# EAGLE board 25mm_battery_board (EAGLE 6.2)
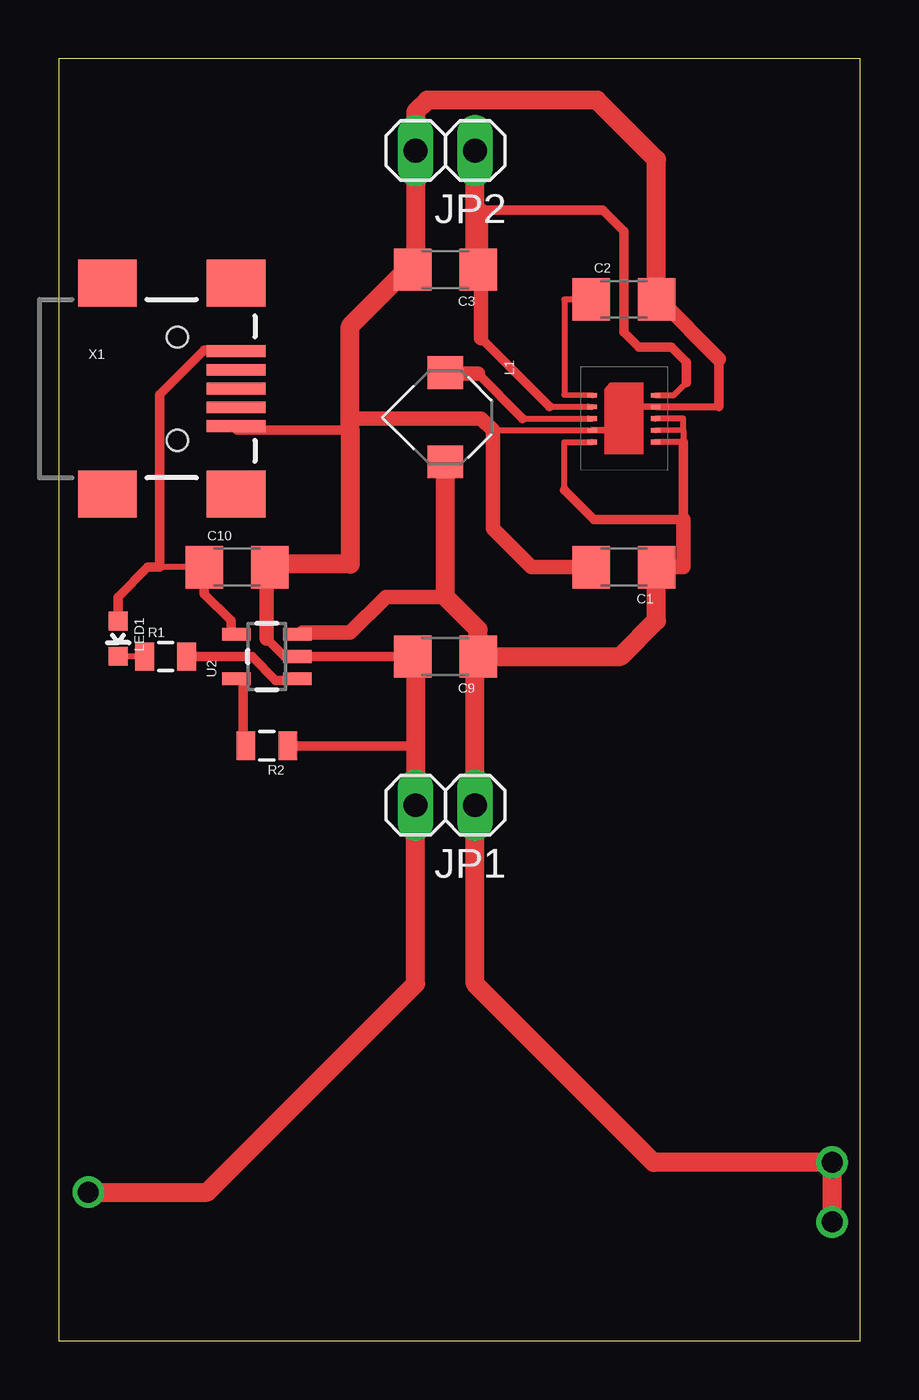
[diagram p0: board, top side]

Size 34.21 x 54.73 mm. Coordinates in mm from the lower left corner, seen from the top.
Outline: 0,0 34.21,0 34.21,54.73 0,54.73 0,0
Copper layers (1*16): Top 0.035mm / dielectric 1.5mm / Bottom 0.035mm
Design rules: minimum track width 10mil, minimum drill 24mil, track to track 8mil, track to pad 8mil, pad to pad 8mil, via to via 8mil, smd to smd 8mil, copper to edge 4mil, drill to drill 24mil, minimum pad ring 10mil, minimum via ring 8mil, stop-mask expansion 10mil, vias tented up to drill 0mil, thermal gap 10mil

## Footprints (pad centres in the part's own frame; a part is rotated, then mirrored left to right if it is on the bottom)
1206 = smd 1.6 x 1.8: 1 -1.4,0; 2 1.4,0
1X02 = drill 1.016 long: 1 -1.27,0; 2 1.27,0
CDRH3D28 = smd 1.4 x 1.5: 1 -1.95,-0.007; 2 1.849,-0.007
LED-0603 = smd 0.8 x 0.8: A 0,-0.75; C 0,0.75
0805 = smd 0.8 x 1.2: 1 -0.9,0; 2 0.9,0
SOT23-5 = smd 0.55 x 1.2: 1 -0.95,-1.3; 2 0,-1.3; 3 0.95,-1.3; 4 0.95,1.3; 5 -0.95,1.3
QFN-10 = smd 0.2 x 0.4: 1 -0.99,-1.35; 2 -0.49,-1.35; 3 0.01,-1.35; 4 0.51,-1.35; 5 1.01,-1.35; 6 1.01,1.35; 7 0.51,1.35; 8 0.01,1.35; 9 -0.49,1.35; 10 -0.99,1.35
USB-MINIB = smd 2.5 x 0.5: D+ 2.5,0; D- 2.5,0.8; GND 2.5,-1.6; ID 2.5,-0.8; VBUS 2.5,1.6 | smd 2.5 x 2: MTN1 -3,4.5; MTN2 2.5,4.5; MTN3 -3,-4.5; MTN4 2.5,-4.5 | hole 0.9: 0,2.2; 0,-2.2

## Placement (x,y rotation side)
C1  10uF  [1206]  24.13,33.02 180 top
C2  10uF  [1206]  24.13,44.45 0 top
C3  10uF  [1206]  16.51,45.72 180 top
C9  4.7uF  [1206]  16.51,29.21 180 top
C10  4.7uF  [1206]  7.62,33.02 0 top
JP1  BATT_CONN  [1X02]  16.51,22.86 180 top
JP2  VOUT_HDR  [1X02]  16.51,50.8 180 top
L1  2.2uH  [CDRH3D28]  16.51,39.37 270 top
LED1  [LED-0603]  2.54,29.97 180 top
R1  150  [0805]  4.57,29.21 0 top
R2  27k  [0805]  8.89,25.4 180 top
U2  MCP73831  [SOT23-5]  8.89,29.21 90 top
U$1  TPS61200-WQFN  [QFN-10]  24.13,39.37 270 top
X1  USBSMD  [USB-MINIB]  5.08,40.64 0 top

## Library data of the parts
C1-C3 C9 C10 L1 LED1 R1 R2 U2 X1 = SparkFun
JP1 JP2 = pinhead
U$1 = Synapseware

## Nets
GND: C1.2 C2.2 C3.2 C9.2 C10.2 JP1.2 JP2.2 R2.1 U2.2 U$1.4 U$1.9 X1.GND
N$1: R1.2 U2.1
N$2: L1.1 U$1.3
N$3: LED1.C R1.1
N$4: C2.1 U$1.1
N$6: R2.2 U2.5
VBATT: C1.1 C9.1 JP1.1 L1.2 U2.3 U$1.5 U$1.6 U$1.7 U$1.8
VOUT: C3.1 JP2.1 U$1.2 U$1.10
VUSB: C10.1 LED1.A U2.4 X1.VBUS

## Tracks (layer width: path | path; a pad name or v marks a point on that pad's centre or on a via)
GND  (via drill 0.9)
  Top 0.254: 8,38.86 X1.GND 7.62,38.86 | 9.65,29.21 U2.2 | 8.89,33.15 C10.2 | 25.65,44.45 C2.2 | 18.54,38.86 22.61,38.86 U$1.4 | 15.24,45.85 C3.2 | 28.19,41.91 28.07,41.91 C2.2 | 28.19,39.88 25.65,39.88 U$1.9 28.18,39.86 28.19,39.88
  Top 0.406: 10.41,25.4 R2.1 15.24,25.4 15.24,25.65 | 15.24,29.21 C9.2 U2.2 | 8.89,29.97 9.65,29.21 | 28.19,41.91 28.19,39.88 | 7.62,38.86 8,38.86 12.45,38.86
  Top 0.61: 8.89,33.15 8.89,29.97 | 15.24,29.08 C9.2 | 25.65,44.45 28.19,41.91 | 12.45,38.86 12.45,39.37 18.03,39.37 18.54,38.86 18.54,34.67 20.19,33.02 C1.2 | 14.86,45.72 15.24,45.85
  Top 0.813: 8.89,33.15 12.45,33.15 12.45,38.86 12.45,43.31 14.86,45.72 | 15.24,45.85 JP2.2 15.24,52.45 15.75,52.96 22.99,52.96 25.53,50.42 C2.2 | v1.27,6.35 6.35,6.35 15.24,15.24 JP1.2 15.24,25.65 15.24,29.08
N$1
  Top 0.254: R1.2 | 10.41,28.19 U2.1
  Top 0.406: R1.2 8.26,29.21 9.27,28.19 10.41,28.19
N$2
  Top 0.254: 19.81,39.37 22.61,39.37 U$1.3 | 16.76,41.27 L1.1
  Top 0.406: 17.91,41.27 19.81,39.37
  Top 0.61: 17.91,41.27 16.76,41.27
N$3
  Top 0.254: LED1.C R1.1 3.68,29.21
N$4
  Top 0.254: U$1.1 21.59,40.39 21.59,44.45 C2.1
N$6
  Top 0.254: 7.87,27.94 7.62,28.19 U2.5 | 7.87,25.4 R2.2
  Top 0.406: 7.87,27.94 7.87,25.4
VBATT  (via drill 0.9)
  Top 0.254: 10.41,30.23 U2.3 | 16.51,37.34 L1.2 | 26.67,38.86 26.67,38.35 U$1.6 | 26.67,38.86 26.67,39.37 U$1.8 | 26.67,38.86 U$1.7 | 21.59,36.32 21.59,38.35 U$1.5 | 25.65,33.02 C1.1
  Top 0.406: 26.67,38.35 26.67,35.05 22.86,35.05 21.59,36.32
  Top 0.61: 10.41,30.23 12.45,30.23 13.97,31.75 16.51,31.75 | 17.78,29.08 C9.1 17.91,30.35 | 25.65,33.02 26.67,33.02 26.67,35.05
  Top 0.813: 17.78,29.08 JP1.1 17.78,15.24 25.4,7.62 v33.02,7.62 v33.02,5.08 | 16.51,37.34 16.51,31.75 17.91,30.35 C9.1 24,29.21 25.53,30.73 C1.1
VOUT
  Top 0.254: 20.95,39.88 22.61,39.88 U$1.2 | 18.03,48.26 C3.1 17.78,45.85 | U$1.10 26.26,40.36 26.8,40.89
  Top 0.406: 18.03,42.8 20.95,39.88 | 26.8,40.89 26.8,41.78 26.16,42.42 24.77,42.42 24.13,43.05 24.13,47.37 23.24,48.26 18.03,48.26
  Top 0.61: 18.03,48.26 18.03,42.8
  Top 0.813: 17.78,45.85 JP2.1
VUSB
  Top 0.254: 4.32,33.02 C10.1 | 7.37,30.23 U2.4 | 7.62,42.29 X1.VBUS
  Top 0.406: LED1.A 2.54,31.75 3.81,33.02 4.32,33.02 4.32,40.39 6.22,42.29 7.62,42.29 | C10.1 6.22,31.88 7.37,30.73 7.37,30.23
(copper drawn outside any net)
  shapes: Top area x3